# EAGLE board i3 Botao (EAGLE 6.0)
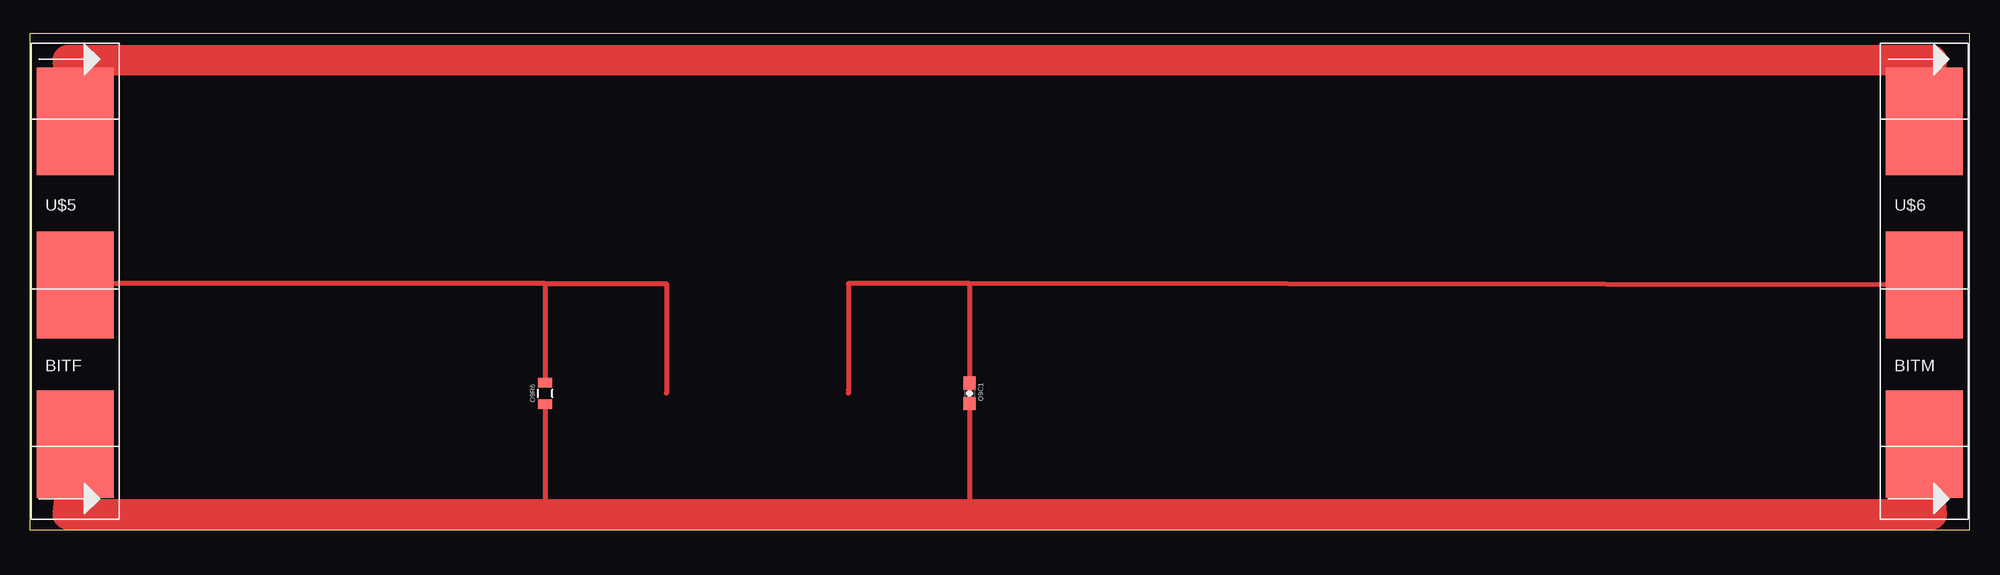
[diagram p0: board, top side]

Size 162.54 x 41.58 mm. Coordinates in mm from the lower left corner, seen from the top.
Outline: 0,0 162.54,0 162.54,41.58 0,41.58 0,0
Copper layers (1*16): Top 0.035mm / dielectric 1.5mm / Bottom 0.035mm
Design rules: minimum track width 10mil, minimum drill 24mil, track to track 8mil, track to pad 8mil, pad to pad 8mil, via to via 8mil, smd to smd 8mil, copper to edge 40mil, drill to drill 8mil, minimum pad ring 10mil, minimum via ring 8mil, stop-mask expansion 4mil, vias tented up to drill 0mil, thermal gap 10mil

## Footprints (pad centres in the part's own frame; a part is rotated, then mirrored left to right if it is on the bottom)
0603-CAP = smd 1.1 x 1: 1 -0.85,0; 2 0.85,0
0805 = smd 0.8 x 1.2: 1 -0.9,0; 2 0.9,0
BITM = smd 6.452 x 8.992: GND 3.81,-13.145; SIG 3.81,0.191; VCC 3.81,13.906

## Placement (x,y rotation side)
O9C1  0.1uF  [0603-CAP]  78.74,11.43 270 top
O9R6  1M  [0805]  43.18,11.43 90 top
U$1  LB_CREDITS  [OSHWCREDIT]  -48.26,1.27 0 top  (outside the outline)
U$3  OSHW-LOGOL  [OSHW-LOGO-L]  -31.75,30.48 0 top  (outside the outline)
U$5  BITF  [BITM]  0,20.32 0 top
U$6  BITM  [BITM]  154.94,20.32 0 top

## Library data of the parts
O9C1 O9R6 U$3 = SparkFun
U$1 = LITTLEBITS
U$5 U$6 = radames

## Nets
GND: O9C1.2 O9R6.1 U$5.GND U$6.GND
SIG: O9R6.2 U$5.SIG
SIGIN: O9C1.1 U$6.SIG
VCC: U$5.VCC U$6.VCC

## Tracks (layer width: path | path; a pad name or v marks a point on that pad's centre or on a via)
GND
  Top 0.406: O9R6.1 43.18,1.27 | O9C1.2 78.74,1.27
  Top 2.54: U$5.GND 3.17,1.27 11.43,1.27 43.18,1.27 47.94,1.27 51.12,1.27 55.56,1.27 58.74,1.27 60.96,1.27 63.18,1.27 66.36,1.27 70.8,1.27 73.98,1.27 75.56,1.27 76.2,1.27 78.74,1.27 80.01,1.27 156.21,1.27 159.38,1.27 U$6.GND
SIG
  Top 0.406: 43.18,20.64 7.3,20.64 U$5.SIG | 43.18,20.64 O9R6.2 | 43.18,20.64 53.34,20.64 53.34,11.43
SIGIN
  Top 0.406: U$6.SIG 78.74,20.64 | 78.74,20.64 O9C1.1 | 78.74,20.64 68.58,20.64 68.58,11.75 68.58,11.43
VCC
  Top 2.54: 51.44,39.37 39.37,39.37 33.66,39.37 33.02,39.37 11.43,39.37 3.17,39.37 U$5.VCC | 51.44,39.37 60.96,39.37 | 60.96,39.37 55.24,39.37 | 55.24,39.37 51.44,39.37 | 51.44,39.37 46.99,39.37 51.44,39.37 | 51.44,39.37 53.34,39.37 55.24,39.37 | 55.24,39.37 60.96,39.37 | 60.96,39.37 63.5,39.37 66.67,39.37 76.2,39.37 80.01,39.37 154.94,39.37 159.38,39.37 U$6.VCC